# Altium PCB Near-E-Filed-Probe.PcbDoc
Units mil, origin at the board's own origin, x right, y up, seen from the top; angles counter-clockwise.
Board outline 3946.36 x 534.2 mil, 4 copper layers (Top Layer, Layer 1, Layer 2, Bottom Layer), stack 61.811 mil thick; 1 components, 2 nets, 5 pads, 446 vias.
Unrouted connection lines stored in the file: 8.
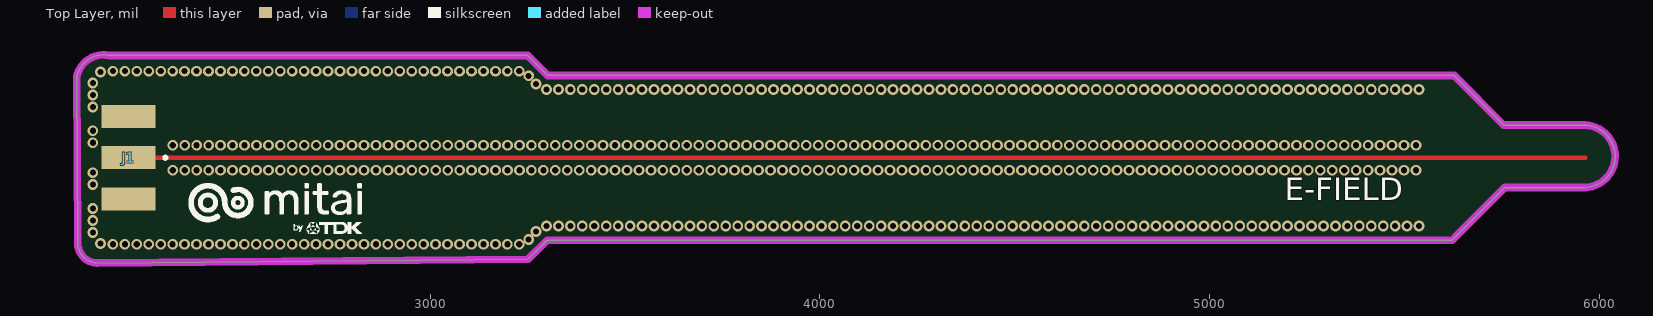
[diagram p0: Top Layer view]
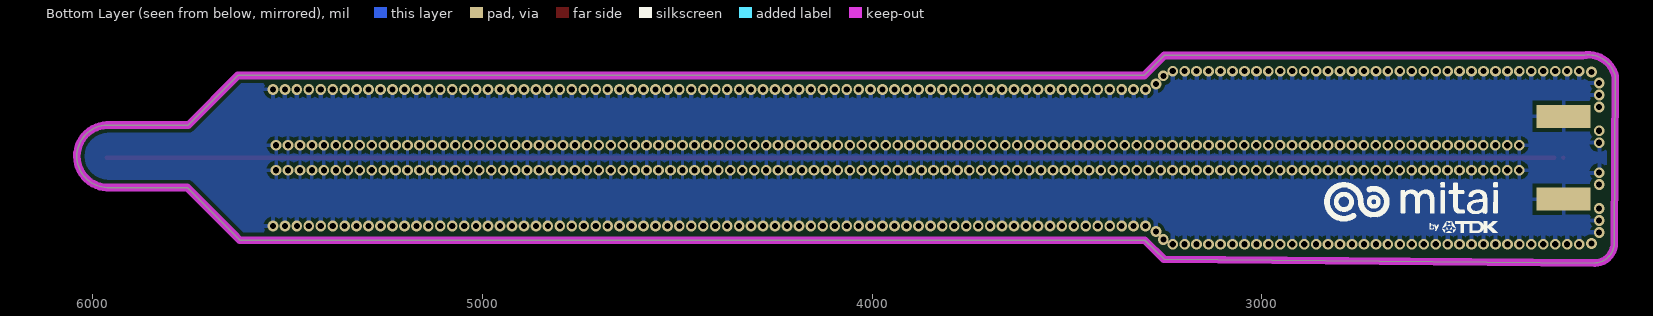
[diagram p1: Bottom Layer view, seen from below]

## Layer stack, top to bottom
Top Solder: solder mask 0.5, Solder Resist, Dk 3.5
Top Layer: signal copper 1.378
Dielectric 2: prepreg 7.874, PP-006, Dk 4.1
Layer 1: signal copper 0.689
Dielectric 1: dielectric 41.9291, FR-4, Dk 4.8
Layer 2: signal copper 0.689
Dielectric 3: prepreg 7.874, PP-006, Dk 4.1
Bottom Layer: signal copper 1.378
Bottom Solder: solder mask 0.5, Solder Resist, Dk 3.5

## Board outline
2147.52,3251.14 cw(c2148.56,3303.96) 2095.73,3305 2093.64,3730.4 cw(c2161.95,3715.49) 2176.87,3783.81 3250.13,3783.81 3301.43,3732.5 5627.22,3732.5 5754.48,3605.24 5963.06,3605.24 cw(c5959.82,3525.13) 5962.53,3445 5756.72,3445 5621.72,3310 3300.24,3310 3250.98,3261.33

## Design rules (kind name [scope] priority, off if disabled: settings)
Clearance [All] p1: gap=10 ignorepadtopadclearanceinfootprint=FALSE except(0: Arc-Hole Track-Hole SMDPad-Hole THPad-Hole Via-Hole Fill-Hole Poly-Hole Region-Hole Text-Hole)
PolygonConnect [All] p1: connectstyle=Relief reliefconductorwidth=10 reliefentries=4 polygonreliefangle="90 Angle" airgapwidth=10
RoutingVias [All] p1: holewidth=28 width=50 viastyle="Through Hole" minholewidth=28 minwidth=50 maxholewidth=28 maxwidth=50
SolderMaskExpansion [All] p1: expansion=4 istentingtop=FALSE
Width [All] p1: maxlimit=10 minlimit=10 preferedwidth=10
30 further rules are at their usual default settings.

## Components (designator, comment, footprint, x,y, rotation, side; value= is the part's Value field where it differs from the comment)
J1 "CON-SMA-EDGE-S" RFSOLUTIONS_CON-SMA-EDGE-S 2226.13,3521.5 r0 top

## Footprints (in the part's own frame and the unit in brackets; to place one, negate y for a bottom-side part, rotate by r counter-clockwise, add the part's x,y. Pads: shape width x height; smd on the part's side, far side on the other; paste and mask are expansions set on the pad)
RFSOLUTIONS_CON-SMA-EDGE-S [mm]
  rect 3.5x1.5 smd: 1(0,0) G1(0,2.7) G2(0,-2.7)
  rect 3.5x1.5 smd far side: G3(0,2.7) G4(0,-2.7)
  silkscreen extent 2.3,-0.1 2.5,0.1, body extent -11.27,-3.17 2.06,3.17, height 3.55

## Part data
J1: "SMA Connector Jack, Female Socket - Board Edge, End Launch Solder", Package=None, Check_prices=https://www.snapeda.com/parts/CON-SMA-EDGE-S/RF+Solutions/view-part/?ref=eda, Digi-Key_Part_Number=CON-SMA-EDGE-S-ND, MF="RF Solutions", MP=CON-SMA-EDGE-S, Purchase-URL=https://pricing.snapeda.com/search/part/CON-SMA-EDGE-S/?ref=eda, SnapEDA_Link=https://www.snapeda.com/parts/CON-SMA-EDGE-S/RF+Solutions/view-part/?ref=snap

## Via types
v1: diameter 27.56, hole 15.75, Top Layer to Bottom Layer, tented both sides, 446 vias

## Nets (pads, with @x,y where several pads share a name; then routed paths per layer and width w, separated by ;. In a path a pad name is that pad's centre, name@x,y a point inside that pad or via, vN(x,y) a via of type N, cw(c..) or ccw(c..) an arc to the next point about the centre after c; other vN are vias at no path point)
GND: J1.G1 J1.G2 J1.G3 J1.G4
  other v1: 2186,3299.5 2216.67,3299.5 2247.33,3299.5 2278,3299.5 2308.66,3299.5 2339.33,3299.5 2370,3299.5 2400.66,3299.5 2431.33,3299.5 2462,3299.5 2492.66,3299.5 2523.33,3299.5 2554,3299.5 2584.66,3299.5 2615.33,3299.5 2646,3299.5 2676.66,3299.5 2707.33,3299.5 2738,3299.5 2768.66,3299.5 2799.33,3299.5 2830,3299.5 2860.66,3299.5 2891.33,3299.5 2922,3299.5 2952.66,3299.5 2983.33,3299.5 2983.33,3299.5 3014,3299.5 3044.66,3299.5 3075.33,3299.5 3106,3299.5 3136.66,3299.5 3167.33,3299.5 3198,3299.5 3228.66,3299.5 2154.48,3301.22 3252.66,3311.5 2134.66,3329.84 3271.66,3332.5 3298.33,3346.5 3329,3346.5 3359.66,3346.5 3390.33,3346.5 3421,3346.5 3451.66,3346.5 3482.33,3346.5 3513,3346.5 3543.66,3346.5 3574.33,3346.5 3605,3346.5 3635.66,3346.5 3666.33,3346.5 3696.99,3346.5 3727.66,3346.5 3758.33,3346.5 3788.99,3346.5 3819.66,3346.5 3850.33,3346.5 3880.99,3346.5 3911.66,3346.5 3942.33,3346.5 3972.99,3346.5 4003.66,3346.5 4034.33,3346.5 4064.99,3346.5 4095.66,3346.5 4126.33,3346.5 4156.99,3346.5 4187.66,3346.5 4218.33,3346.5 4248.99,3346.5 4279.66,3346.5 4310.33,3346.5 4340.99,3346.5 4371.66,3346.5 4402.33,3346.5 4432.99,3346.5 4463.66,3346.5 4494.33,3346.5 4524.99,3346.5 4555.66,3346.5 4586.33,3346.5 4616.99,3346.5 4647.66,3346.5 4678.33,3346.5 4708.99,3346.5 4739.66,3346.5 4770.33,3346.5 4800.99,3346.5 4831.66,3346.5 4862.33,3346.5 4892.99,3346.5 4923.66,3346.5 4954.33,3346.5 4984.99,3346.5 5015.66,3346.5 5046.33,3346.5 5076.99,3346.5 5107.66,3346.5 5138.33,3346.5 5168.99,3346.5 5199.66,3346.5 5230.32,3346.5 5260.99,3346.5 5291.66,3346.5 5322.32,3346.5 5352.99,3346.5 5383.66,3346.5 5414.32,3346.5 5444.99,3346.5 5475.66,3346.5 5506.32,3346.5 5536.99,3346.5 2134.66,3360.5 2134.66,3391.17 2134.66,3452.5 2134.66,3483.17 2339.66,3489.5 2370.33,3489.5 2401,3489.5 2431.66,3489.5 2462.33,3489.5 2493,3489.5 2523.66,3489.5 2554.33,3489.5 2585,3489.5 2615.66,3489.5 2646.33,3489.5 2677,3489.5 2707.66,3489.5 2738.33,3489.5 2769,3489.5 2799.66,3489.5 2830.33,3489.5 2861,3489.5 2891.66,3489.5 2922.33,3489.5 2953,3489.5 2983.66,3489.5 3014.33,3489.5 3045,3489.5 3075.66,3489.5 3106.33,3489.5 3137,3489.5 3167.66,3489.5 3198.33,3489.5 3229,3489.5 3259.66,3489.5 3290.33,3489.5 3321,3489.5 3351.66,3489.5 3382.33,3489.5 3413,3489.5 3443.66,3489.5 3474.33,3489.5 3505,3489.5 3535.66,3489.5 3566.33,3489.5 3597,3489.5 3627.66,3489.5 3658.33,3489.5 3688.99,3489.5 3719.66,3489.5 3750.33,3489.5 3780.99,3489.5 3811.66,3489.5 3842.33,3489.5 3872.99,3489.5 3903.66,3489.5 3934.33,3489.5 3964.99,3489.5 3995.66,3489.5 4026.33,3489.5 4056.99,3489.5 4087.66,3489.5 4118.33,3489.5 4148.99,3489.5 4179.66,3489.5 4210.33,3489.5 4240.99,3489.5 4271.66,3489.5 4302.33,3489.5 4332.99,3489.5 4363.66,3489.5 4394.33,3489.5 4424.99,3489.5 4455.66,3489.5 4486.33,3489.5 4516.99,3489.5 4547.66,3489.5 4578.33,3489.5 4608.99,3489.5 4639.66,3489.5 4670.33,3489.5 4700.99,3489.5 4731.66,3489.5 4762.33,3489.5 4792.99,3489.5 4823.66,3489.5 4854.33,3489.5 4884.99,3489.5 4915.66,3489.5 4946.33,3489.5 4976.99,3489.5 5007.66,3489.5 5038.33,3489.5 5068.99,3489.5 5099.66,3489.5 5130.33,3489.5 5160.99,3489.5 5191.66,3489.5 5222.32,3489.5 5252.99,3489.5 5283.66,3489.5 5314.32,3489.5 5344.99,3489.5 5375.66,3489.5 5406.32,3489.5 5436.99,3489.5 5467.66,3489.5 5498.32,3489.5 5528.99,3489.5 2339.66,3553.5 2370.33,3553.5 2401,3553.5 2431.66,3553.5 2462.33,3553.5 2493,3553.5 2523.66,3553.5 2554.33,3553.5 2585,3553.5 2615.66,3553.5 2646.33,3553.5 2677,3553.5 2707.66,3553.5 2738.33,3553.5 2769,3553.5 2799.66,3553.5 2830.33,3553.5 2861,3553.5 2891.66,3553.5 2922.33,3553.5 2953,3553.5 2983.66,3553.5 3014.33,3553.5 3045,3553.5 3075.66,3553.5 3106.33,3553.5 3137,3553.5 3167.66,3553.5 3198.33,3553.5 3229,3553.5 3259.66,3553.5 3290.33,3553.5 3321,3553.5 3351.66,3553.5 3382.33,3553.5 3413,3553.5 3443.66,3553.5 3474.33,3553.5 3505,3553.5 3535.66,3553.5 3566.33,3553.5 3597,3553.5 3627.66,3553.5 3658.33,3553.5 3688.99,3553.5 3719.66,3553.5 3750.33,3553.5 3780.99,3553.5 3811.66,3553.5 3842.33,3553.5 3872.99,3553.5 3903.66,3553.5 3934.33,3553.5 3964.99,3553.5 3995.66,3553.5 4026.33,3553.5 4056.99,3553.5 4087.66,3553.5 4118.33,3553.5 4148.99,3553.5 4179.66,3553.5 4210.33,3553.5 4240.99,3553.5 4271.66,3553.5 4302.33,3553.5 4332.99,3553.5 4363.66,3553.5 4394.33,3553.5 4424.99,3553.5 4455.66,3553.5 4486.33,3553.5 4516.99,3553.5 4547.66,3553.5 4578.33,3553.5 4608.99,3553.5 4639.66,3553.5 4670.33,3553.5 4700.99,3553.5 4731.66,3553.5 4762.33,3553.5 4792.99,3553.5 4823.66,3553.5 4854.33,3553.5 4884.99,3553.5 4915.66,3553.5 4946.33,3553.5 4976.99,3553.5 5007.66,3553.5 5038.33,3553.5 5068.99,3553.5 5099.66,3553.5 5130.33,3553.5 5160.99,3553.5 5191.66,3553.5 5222.32,3553.5 5252.99,3553.5 5283.66,3553.5 5314.32,3553.5 5344.99,3553.5 5375.66,3553.5 5406.32,3553.5 5436.99,3553.5 5467.66,3553.5 5498.32,3553.5 5528.99,3553.5 2134.66,3559.84 2134.66,3590.5 2134.66,3651.84 2134.66,3682.5 3298.33,3696.5 3329,3696.5 3359.66,3696.5 3390.33,3696.5 3421,3696.5 3451.66,3696.5 3482.33,3696.5 3513,3696.5 3543.66,3696.5 3574.33,3696.5 3605,3696.5 3635.66,3696.5 3666.33,3696.5 3696.99,3696.5 3727.66,3696.5 3758.33,3696.5 3788.99,3696.5 3819.66,3696.5 3850.33,3696.5 3880.99,3696.5 3911.66,3696.5 3942.33,3696.5 3972.99,3696.5 4003.66,3696.5 4034.33,3696.5 4064.99,3696.5 4095.66,3696.5 4126.33,3696.5 4156.99,3696.5 4187.66,3696.5 4218.33,3696.5 4248.99,3696.5 4279.66,3696.5 4310.33,3696.5 4340.99,3696.5 4371.66,3696.5 4402.33,3696.5 4432.99,3696.5 4463.66,3696.5 4494.33,3696.5 4524.99,3696.5 4555.66,3696.5 4586.33,3696.5 4616.99,3696.5 4647.66,3696.5 4678.33,3696.5 4708.99,3696.5 4739.66,3696.5 4770.33,3696.5 4800.99,3696.5 4831.66,3696.5 4862.33,3696.5 4892.99,3696.5 4923.66,3696.5 4954.33,3696.5 4984.99,3696.5 5015.66,3696.5 5046.33,3696.5 5076.99,3696.5 5107.66,3696.5 5138.33,3696.5 5168.99,3696.5 5199.66,3696.5 5230.32,3696.5 5260.99,3696.5 5291.66,3696.5 5322.32,3696.5 5352.99,3696.5 5383.66,3696.5 5414.32,3696.5 5444.99,3696.5 5475.66,3696.5 5506.32,3696.5 5536.99,3696.5 3271.66,3710.5 2134.66,3713.17 3252.66,3731.5 2154.48,3741.22 2186,3743.5 2216.67,3743.5 2247.33,3743.5 2278,3743.5 2308.66,3743.5 2339.33,3743.5 2370,3743.5 2400.66,3743.5 2431.33,3743.5 2462,3743.5 2492.66,3743.5 2523.33,3743.5 2554,3743.5 2584.66,3743.5 2615.33,3743.5 2646,3743.5 2676.66,3743.5 2707.33,3743.5 2738,3743.5 2768.66,3743.5 2799.33,3743.5 2830,3743.5 2860.66,3743.5 2891.33,3743.5 2922,3743.5 2952.66,3743.5 2983.33,3743.5 2983.33,3743.5 3014,3743.5 3044.66,3743.5 3075.33,3743.5 3106,3743.5 3136.66,3743.5 3167.33,3743.5 3198,3743.5 3228.66,3743.5
PROBE: J1.1 | length 3386.2
  Top Layer w11.55: J1.1@2249.48,3521.5 5635.66,3521.5
copper on no net: | length 327.4
  Top Layer w11.55: 5635.66,3521.5 5963.06,3521.5

## Polygon pours and split planes (outlines as drawn)
GND on Bottom Layer "GND_L04_P000" (solid, pour order 0): 2124.76,3774.1 2129.35,3777.06 2130.13,3777.56 2143.04,3782.68 2156.58,3785.13 2171,3784.75 2177.05,3783.32 2212.14,3783.32 2281.18,3783.32 2419.32,3783.32 2695.39,3783.32 2971.49,3783.32 3109.57,3783.32 3250.3,3783.32 3251.59,3781.86 3250.3,3783.32 3251.79,3781.83 3301.61,3732.01 5627.4,3732.01 5752.57,3607.12 5752.57,3604.75 5961.28,3604.81 5970.91,3604.51 5977.83,3602.81 5985.86,3600.93 5991.75,3598.26 5999.9,3594.66 6012.55,3585.71 6023.7,3573.97 6031.67,3561.44 6037.22,3547.38 6040.32,3531.42 6040.12,3517.02 6036.94,3501.88 6034.31,3495.45 6031.03,3487.47 6024,3476.58 6021.49,3473.37 6016.37,3468.11 6011.64,3463.52 6009.08,3461.77 5999.26,3454.91 5985.43,3448.76 5970.41,3445.24 5961.7,3445.07 5953.05,3445.05 5935.64,3445 5756.9,3444.51 5621.9,3309.51 3300.42,3309.51 3253.48,3260.86 2143.04,3250.61 2135.99,3252.2 2132.61,3252.86 2122.67,3257.24 2113.95,3263.34 2107.01,3270.62 2101.35,3279.52 2097.68,3289.15 2097.44,3290.39 2095.81,3299.24 2095.81,3299.43 2095.91,3304.55 2093.81,3729.92 2095.19,3736.51 2100.17,3747.88 2100.67,3749.11 2109.01,3760.98 2118.19,3769.79

## Keep-outs
Keep-Out Layer:
  lines w19.68: 2093.64,3730.4 2095.82,3303.52 ; 2146.12,3251.21 3250.98,3261.33 3300.24,3310 5621.72,3310 5638.12,3326.4 5756.72,3445 ; 2176.87,3783.81 3250.13,3783.81 3293.33,3740.61 3301.43,3732.5 5627.22,3732.5 5754.48,3605.24 5963.06,3605.24 ; 5761.72,3445 5962.53,3445
  lines w19.69: 2093.64,3730.4 cw(c2161.95,3715.49) 2176.87,3783.81 ; 2095.82,3303.52 ccw(c2147.13,3302.52) 2146.12,3251.21 ; 5962.53,3445 ccw(c5959.82,3525.13) 5963.06,3605.24

## Silkscreen, mask and mechanical layers (free items; w line width, h text height)
Top Overlay:
  drawing of 16 lines, arcs and shapes, not listed
  text "E-FIELD" at 5191.84,3393.18 h100
Bottom Overlay:
  drawing of 16 lines, arcs and shapes, not listed